# Altium PCB IG-2.PCBDOC (part 2 of 3)
Units mil, origin at the board's own origin, x right, y up, seen from the top; angles counter-clockwise.
Board outline 1834.65 x 964.57 mil, 4 copper layers (Top, GND Plane, Mid1-Ver, Bottom), stack 61.6 mil thick; 34 components, 46 nets, 345 pads, 276 vias.
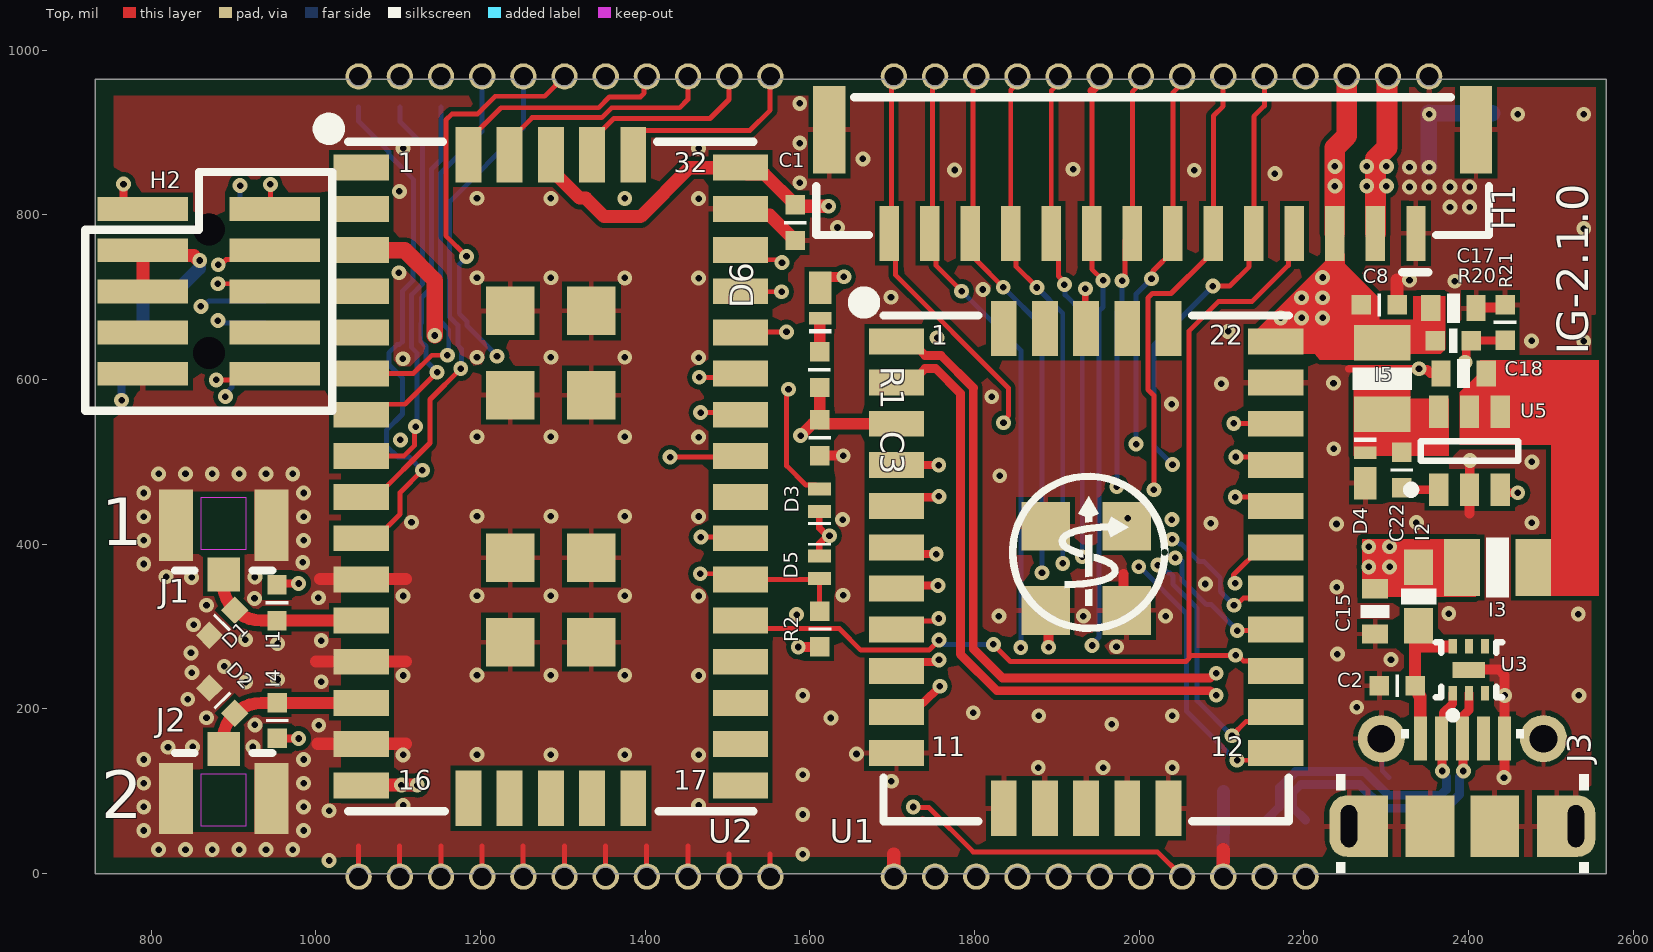
[diagram p0: Top view]

## Via types
v1: diameter 18, hole 8, Top to Bottom, 276 vias

## Nets (pads, with @x,y where several pads share a name; then routed paths per layer and width w, separated by ;. In a path a pad name is that pad's centre, name@x,y a point inside that pad or via, vN(x,y) a via of type N, cw(c..) or ccw(c..) an arc to the next point about the centre after c; other vN are vias at no path point) (continued)
G2/Tx2TxCAN/SDA/STRB: (continued)
  Mid1-Ver w6: v1(1756.69,458.17) 1757.96,456.89 1796.35,456.89 1801.35,451.89 1958.1,451.89 1958.25,451.75 2001.26,451.75 2015.66,466.16 v1(2017.86,466.16)
G5/SCLK/STRBE: H1.9 U1.9 U4.9 | length 976.4
  Top w6: 1942.4,950.66 H1.9@1942.4,777.61 1942.5,777.5 1942.5,734.11 v1(1956.14,720.47) ; v1@1942.6,277.28 v1(1942.81,277.08)
  Top w10: U1.9@1698.27,246.33 1709.01,257.08 1752.18,257.08 1754.71,259.61 v1(1756.88,259.61) ; 1942.4,950.66 1951.87,960.14 U4.9@1951.87,966.09
  Mid1-Ver w6: v1(1756.88,259.61) 1759.17,261.91 1773.34,261.91 1804.29,292.85 1813.3,292.85 1815.79,295.35 1829.88,295.35 1832.37,292.85 1927.04,292.85 v1(1942.81,277.08)
  Bottom w6: v1@1942.81,277.49 1942.81,278.64 1950.94,286.76 1950.94,682.96 1956.14,688.16 v1(1956.14,720.47)
G6/Rx1/MOSI: H1.10 U1.6 U4.10 | length 840.4
  Top w6: U4.10@1901.87,966.09 1901.87,959.6 1893.18,950.91 H1.10@1893.18,777.61 1901.99,768.8 1901.99,725.66 1909.06,718.6 v1(1909.06,715.35)
  Top w10: U1.6@1699.85,394.75 1706.52,388.08 v1(1753.51,388.08)
  Mid1-Ver w6: v1(1753.51,388.08) 1778.24,388.08 1784.24,394.08 1918.44,394.08 1927.59,384.93 v1(1930.83,384.93)
  Bottom w6: v1(1909.06,715.35) 1910.02,714.39 1910.02,702.86 1930.83,682.05 v1(1930.83,384.93)
G7/Tx1/MISO: H1.11 U1.7 U4.11 | length 845.3
  Top w6: U4.11@1851.87,966.09 1851.87,959.6 1843.97,951.7 H1.11@1843.97,777.61 1850.2,771.38 1850.2,737.59 1875.78,712.01 v1(1875.78,711.87)
  Top w10: U1.7@1698.27,346.33 1701.85,349.92 v1(1755.64,349.92)
  Mid1-Ver w6: v1@1756.13,349.92 1756.13,350.41 1788.8,383.08 1888.36,383.08 1892.4,379.04 1904.82,379.04 v1(1907.11,376.75)
  Bottom w6: v1@1875.85,711.94 1875.85,711.8 1907.11,680.54 v1(1907.11,376.75)
G8/C\S\/STRB: H1.12 U1.8 U4.12 | length 853
  Top w6: U1.8@1698.27,296.33 1709.01,307.08 1751.48,307.08 1754.27,309.86 v1(1756.43,309.86) ; U4.12@1801.87,966.09 1798.31,962.54 1798.31,781.16 H1.12@1794.76,777.61 1802.57,769.8 1802.57,744.54 v1@1834.87,712.24
  Mid1-Ver w6: v1@1755.35,309.86 v1(1756.43,309.86) 1812.07,365.5 v1(1881.9,365.5)
  Bottom w6: v1(1834.79,712.17) 1881.9,665.07 v1(1881.9,365.5)
G9/S\P\I\_\E\N\/DRDY/STRB: H1.13 U1.10 U4.13 | length 915.1
  Top w6: U4.13@1751.87,966.09 1748.71,962.93 1748.71,780.77 H1.13@1745.55,777.61 1752.98,770.17 1752.98,738.8 1784.35,707.43 v1(1784.35,707.29)
  Top w10: U1.10@1709.01,207.08 1737.39,207.08 v1(1757.86,227.55)
  Mid1-Ver w6: v1(1757.86,227.55) 1791.66,261.35 1843.02,261.35 v1(1856.15,274.48)
  Bottom w6: v1@1784.42,707.36 1856.15,635.63 v1(1856.15,274.48)
G10/CHIP_ERASE: U1.17 U4.17 | length 571.8
  Top w6: v1(2116.42,352.67) 2114.5,354.58 2114.5,362.5 2114.37,362.63 2148.07,396.33 U1.17@2172.68,396.33
  Mid1-Ver w6: U4.17@1802.09,-3.54 1933.3,127.67 1933.3,173.52 2096.76,336.97 2100.66,336.97 2116.36,352.67 v1(2116.42,352.67)
G11/SWDIO: H2.2 U1.16 U4.18 | length 1998.9
  Top w6: v1(944.88,837.01) 944.88,812.28 H2.2@950.08,807.09 ; v1(2115.07,325.93) 2117.78,325.93 2126.44,334.58 2160.93,334.58 U1.16@2172.68,346.33
  Mid1-Ver w6: v1(944.88,837.01) 943.49,835.62 943.49,775.16 1013.26,705.38 1498.29,705.38 1543.59,660.08 1543.59,646.28 1560.76,629.11 1592.44,629.11 1716.16,505.39 1716.16,474.66 1751.92,438.89 1951.82,438.89 1976.19,414.53 2019.59,414.53 2025.68,408.44 2037.56,408.44 v1(2039.86,406.15) ; U4.18@1852.09,-3.54 1983.78,128.15 1983.78,173.08 1996.03,185.33 1996.03,217.86 2084.88,306.71 2095.85,306.71 v1(2115.07,325.93)
  Bottom w6: v1(2039.86,406.15) 2043.11,406.15 2048.79,400.46 2051.03,400.46 2072.24,379.26 2078.39,379.26 2098.42,359.24 2098.42,342.59 v1(2115.07,325.93)